# Altium PCB Arduino幻彩灯带_v2.PcbDoc
Units mil, origin at the board's own origin, x right, y up, seen from the top; angles counter-clockwise.
Board outline 2710.03 x 2110.03 mil, 2 copper layers (Top Layer, Bottom Layer); 35 components, 33 nets, 137 pads, 66 vias.
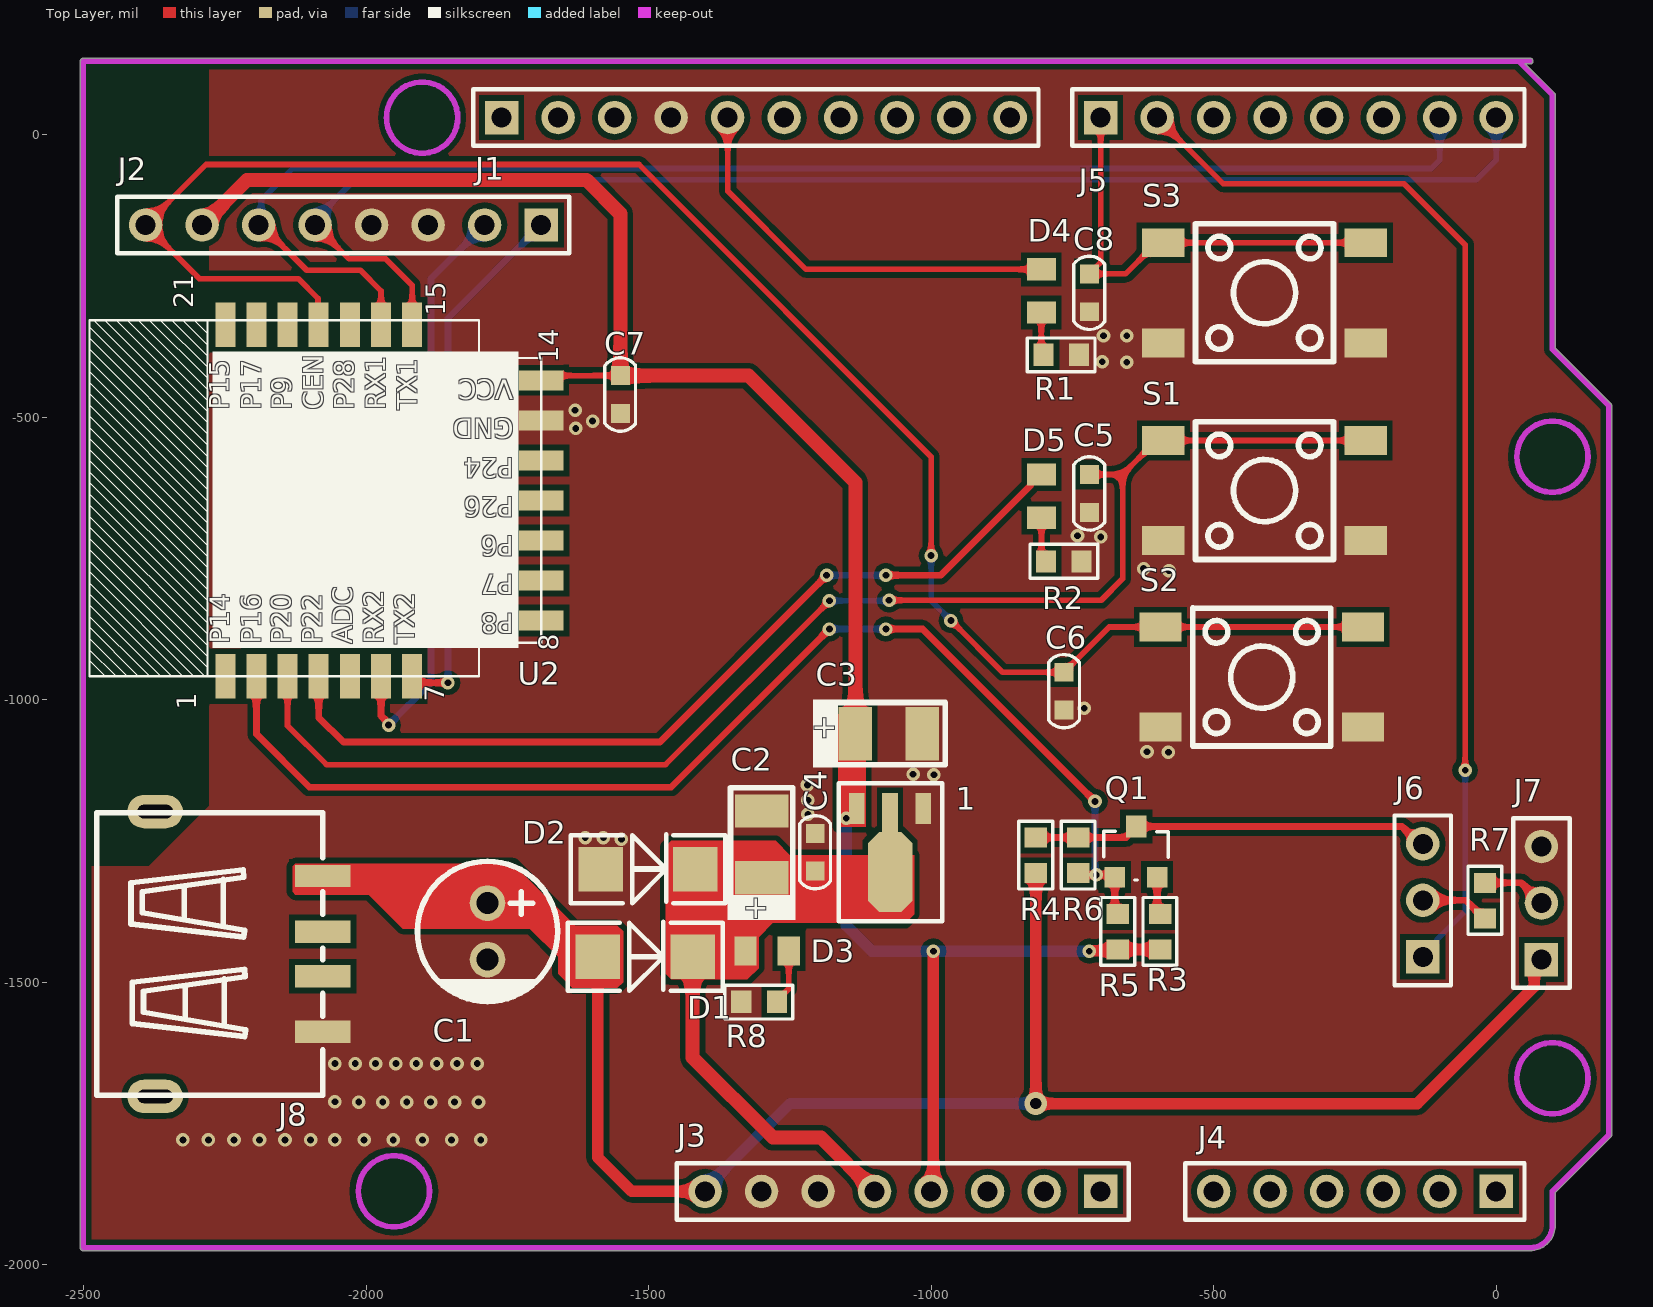
[diagram p0: Top Layer view]
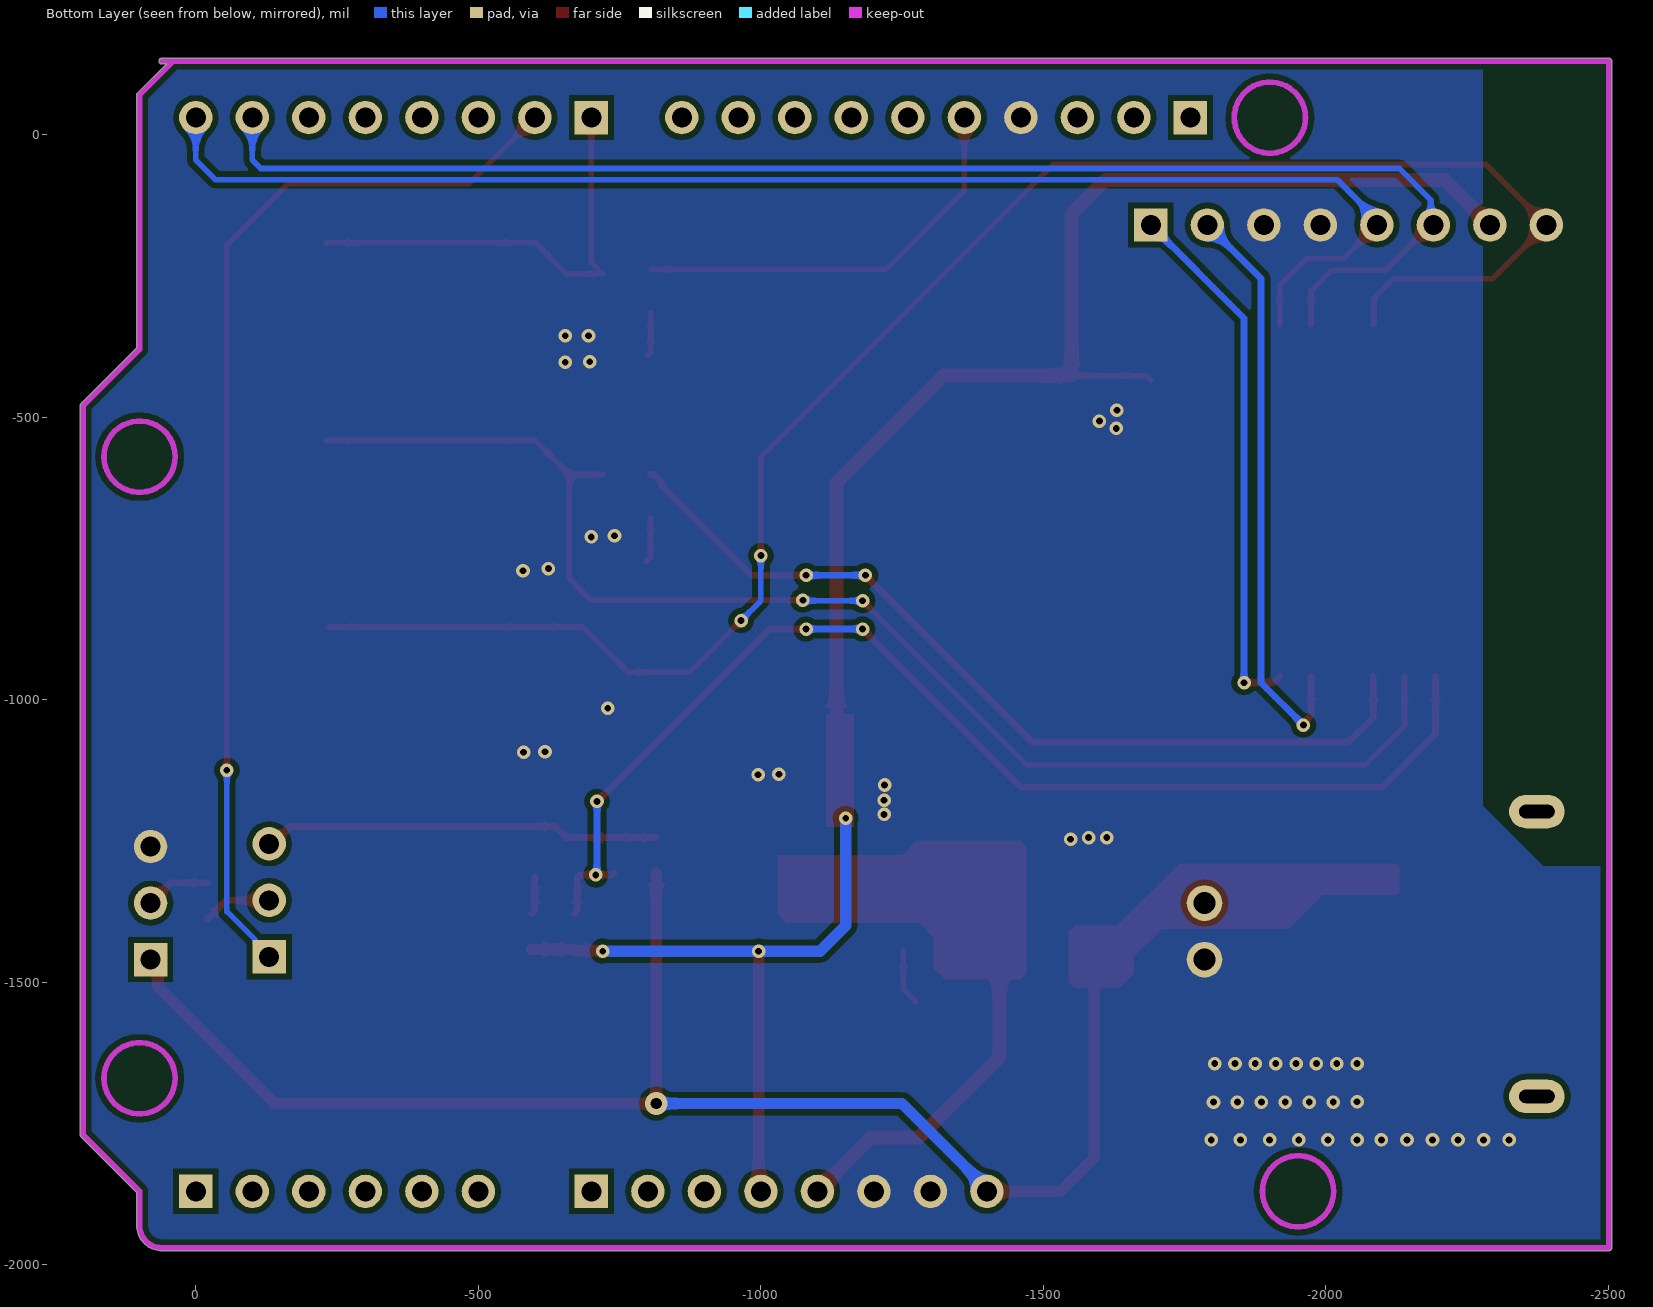
[diagram p1: Bottom Layer view, seen from below]
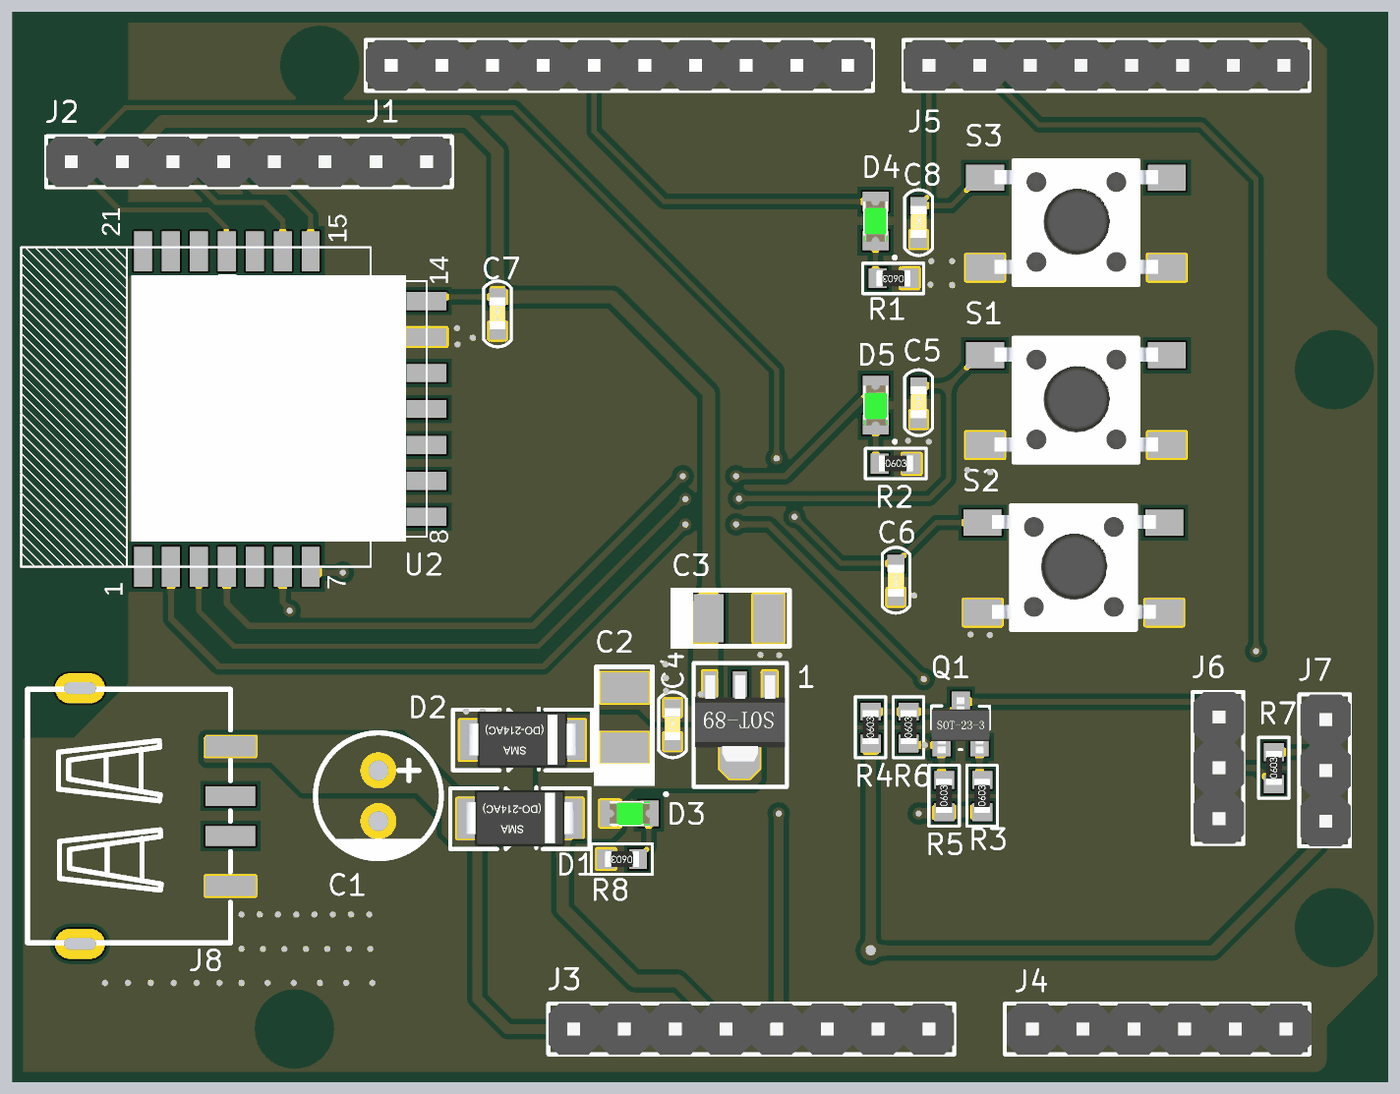
[diagram p2: 3D render of the assembled board from above, using the file's embedded part models]

## Layer stack, top to bottom
Top Solder: solder mask 0.4, Solder Resist, Dk 3.5
Top Layer: signal copper 1.4
Dielectric 1: dielectric 12.6, FR-4, Dk 4.8
Bottom Layer: signal copper 1.4
Bottom Solder: solder mask 0.4, Solder Resist, Dk 3.5

## Board outline
-2505.65,-1970 ccw(c-2500.63,-1970) -2500.63,-1975.01 60,-1975.01 60,-1975.02 ccw(c60,-1930.63) 104.39,-1930.63 ccw(c99.37,-1930.63) 104.38,-1930.6 104.38,-1872.08 202.92,-1773.55 202.89,-1773.57 ccw(c199.37,-1770) 204.39,-1770 204.38,-480.04 ccw(c199.37,-480) 204.38,-480 ccw(c199.37,-480) 202.92,-476.45 104.38,-377.92 104.38,70 ccw(c99.37,70) 102.9,73.56 102.92,73.55 51.48,124.99 60,124.99 ccw(c60,130) 65.01,130 ccw(c60,130) 60,135.02 -2500.63,135.02 ccw(c-2500.63,130) -2505.65,130

## Design rules (kind name [scope] priority, off if disabled: settings)
Clearance [All] p1: gap=10 ignorepadtopadclearanceinfootprint=FALSE except(0: Arc-Hole Track-Hole SMDPad-Hole THPad-Hole Via-Hole Fill-Hole Poly-Hole Region-Hole Text-Hole)
HoleSize [All] p1: absolutevalues=TRUE maxlimit=100 minlimit=0 maxpercent=80.000 minpercent=20.000
HoleToHoleClearance [All] p1: gap=0 allowstackedmicrovias=TRUE
MinimumSolderMaskSliver [All] p1: minsoldermaskwidth=0
PolygonConnect [All] p1: connectstyle=Direct reliefconductorwidth=10 reliefentries=4 polygonreliefangle="90 Angle" airgapwidth=10
RoutingVias [All] p1: holewidth=12 width=24 viastyle="Through Hole" minholewidth=12 minwidth=24 maxholewidth=25 maxwidth=50
SilkToSilkClearance [All] p1: silktosilkclearance=0
SilkToSolderMaskClearance [IsPad] p1: minsilkscreentomaskgap=0 clearancetoexposedcopper=TRUE
SolderMaskExpansion [All] p1: expansion=4 istentingtop=FALSE
Width [All] p1: maxlimit=50 minlimit=10 preferedwidth=20 minimp=50.000000 maximp=50.000000 favimp=50.000000
25 further rules are at their usual default settings.

## Components (designator, comment, footprint, x,y, rotation, side; value= is the part's Value field where it differs from the comment)
1 "ME6211A33PG-N" SOT89 -1075,-1305 r180 top
C1 "220uF±20%/16V" CAP-6.3*xx -1785,-1410 r270 top
C2 "22uF±20%/16V" "C-钽电容B3528 - duplicate" -1300,-1255.94 r90 top
C3 "22uF±20%/16V" "C-钽电容B3528 - duplicate" -1075,-1060 r0 top
C4 "0.1uF±20%/50V" C-0603 -1205,-1270 r90 top
C5 "0.1uF±20%/16V" C-0603 -720,-635 r90 top
C6 "0.1uF±20%/16V" C-0603 -765,-985 r270 top
C7 "0.1uF±20%/16V" C-0603 -1550,-460 r90 top
C8 "0.1uF±20%/16V" C-0603 -720,-280 r90 top
D1 "SS210" D-SMA -1501,-1457 r180 top
D2 "SMBJ05CA" D-SMA -1496,-1302 r180 top
D3 "LED" LED-0805-G -1290,-1445 r0 top
D4 "LED" LED-0805-G -805.26,-276.86 r270 top
D5 "LED" LED-0805-G -805,-640 r270 top
J1 "CON10" HDR1X10 -1760,30 r0 top locked
J2 "CON8" HDR1X8 -1690,-160 r180 top
J3 "CON8" HDR1X8 -700,-1870 r180 top locked
J4 "CON6" HDR1X6 0,-1870 r180 top locked
J5 "CON8" HDR1X8 -700,30 r0 top locked
J6 "KF301-3P" HDR1X3 -130,-1455 r90 top
J7 "KF301-3P" HDR1X3 80,-1460 r90 top
J8 "USB-A" USB-A-TH_C42425 -2225,-1450 r270 top
Q1 "S8050" SOT-23 -635,-1280 r0 top
R1 "1K±5%" R0603 -770,-390 r180 top
R2 "1K±5%" R0603 -765,-755 r0 top
R3 "2K±5%" R0603 -595,-1410 r90 top
R4 "2K±5%" R0603 -815,-1275 r90 top
R5 "2K±5%" R0603 -670,-1410 r90 top
R6 "NC/0R" R0603 -740,-1275 r90 top
R7 "1R±5%" R0603 -20,-1355 r90 top
R8 "1R±5%" R0603 -1305,-1535 r180 top
S1 "KEY_SW2" 按键-SW_4P-L6.0-W6.0-P4.50-LS9.5 -410,-630 r180 top
S2 "KEY_SW2" 按键-SW_4P-L6.0-W6.0-P4.50-LS9.5 -415,-960 r180 top
S3 "KEY_SW2" 按键-SW_4P-L6.0-W6.0-P4.50-LS9.5 -410,-280 r180 top
U2 "WIFI_BLE_CBU" WIFI_BLE_CBU -1690,-647.4 r90 top

## Footprints (in the part's own frame and the unit in brackets; to place one, negate y for a bottom-side part, rotate by r counter-clockwise, add the part's x,y. Pads: shape width x height; smd on the part's side, far side on the other; paste and mask are expansions set on the pad)
C-0603 [mm]
  rect 0.85x0.85 smd: 1(-0.85,0) 2(0.85,0)
  silkscreen extent -1.65,-0.68 1.65,0.7, body extent -0.77,-0.39 0.83,0.41, height 0.45
"C-钽电容B3528 - duplicate" [mm]
  rect 1.5x2.4 smd: 1(-1.5,0) 2(1.5,0)
  silkscreen extent -3.4,-1.52 2.54,1.52
CAP-6.3*xx [mm]
  round 1.6 hole 1: 1(-1.27,0) 2(1.27,0)
  silkscreen extent -3.15,-3.15 3.17,3.15
D-SMA [mil]
  rect 78.74x78.74 smd: A(89,-2) K(-79,-2)
  silkscreen extent -132,-64 142,58, body extent -103,-58 113,52, height 102
HDR1X3 [mm] "Connector; Header; 3 Position"
  rect 1.5x1.5 hole 0.9: 1(0,0)
  round 1.5 hole 0.9: 2(2.54,0) 3(5.08,0)
  silkscreen extent -1.27,-1.27 6.35,1.27, body extent -1.27,-1.32 6.35,1.22, height 8.54
HDR1X6 [mm] "Connector; Header; 6 Position"
  rect 1.5x1.5 hole 0.9: 1(0,0)
  round 1.5 hole 0.9: 2(2.54,0) 3(5.08,0) 4(7.62,0) 5(10.16,0) 6(12.7,0)
  silkscreen extent -1.27,-1.27 13.97,1.27, body extent -1.37,-1.27 13.87,1.27, height 8.54
HDR1X8 [mm] "Connector; Header; 8 Position"
  rect 1.5x1.5 hole 0.9: 1(0,0)
  round 1.5 hole 0.9: 2(2.54,0) 3(5.08,0) 4(7.62,0) 5(10.16,0) 6(12.7,0) 7(15.24,0) 8(17.78,0)
  silkscreen extent -1.27,-1.27 19.05,1.27, body extent -1.27,-1.27 19.05,1.27, height 8.54
HDR1X10 [mm] "Connector; Header; 10 Position"
  rect 1.5x1.5 hole 0.9: 1(0,0)
  round 1.5 hole 0.9: 2(2.54,0) 3(5.08,0) 4(7.62,0) 5(10.16,0) 6(12.7,0) 7(15.24,0) 8(17.78,0) 9(20.32,0) 10(22.86,0)
  silkscreen extent -1.27,-1.27 24.13,1.27, body extent -1.27,-1.27 24.13,1.27, height 8.54
LED-0805-G [mm]
  round 0.3 on Top Overlay mask+0: 2(1.829,0.965)
  rect 1x1.3 smd: LED+(-0.974,0.007) LED-(0.969,0.007)
  body extent -0.99,-0.62 1.03,0.64, height 1.1
R0603 [mm] "10/1W"
  rect 0.9x1 smd: 1(-0.813,-0.009) 2(0.787,-0.009)
  silkscreen extent -1.52,-0.76 1.52,0.76, body extent -0.85,-0.4 0.85,0.4, height 0.56
SOT89 [mm]
  rect 0.7x1.4 smd: 1(-1.557,-2.856) 3(1.443,-2.856)
  oct 2x3.6 smd: 2(-0.057,-0.006)
  rect 0.7x1.9 smd: 2(-0.057,-2.605)
  silkscreen extent -2.41,-3.98 2.25,2.22, body extent -2.33,-3.36 2.17,0.94
SOT-23 [mil]
  rect 36x36 smd: 1(-40,-34) 2(35,-34)
  rect 36x39.37 smd: 3(-2,55.5)
  silkscreen extent -60,-39 54,47, body extent -60,-46 55,64
USB-A-TH_C42425 [mm]
  rect 1x2.5 smd: 1(-3.5,3.765) 2(-1,3.765) 3(1,3.765) 4(3.5,3.765)
  oval 1.5x2.499 hole 0.6 slot 1.601 at 90 deg: 5(6.4,-3.765) 6(-6.4,-3.765)
  silkscreen extent -6.35,-6.39 6.35,3.77
WIFI_BLE_CBU [mm]
  rect 2x0.9 smd: 1(-7.9,14.2) 2(-7.9,12.8) 3(-7.9,11.4) 4(-7.9,10) 5(-7.9,8.6) 6(-7.9,7.2) 7(-7.9,5.8) 15(7.9,5.8) 16(7.9,7.2) 17(7.9,8.6) 18(7.9,10) 19(7.9,11.4) 20(7.9,12.8) 21(7.9,14.2)
  rect 0.9x2 smd: 8(-5.4,0) 9(-3.6,0) 10(-1.8,0) 11(0,0) 12(1.8,0) 13(3.6,0) 14(5.4,0)
  silkscreen extent -7.9,0 8.14,20.33
按键-SW_4P-L6.0-W6.0-P4.50-LS9.5 [mil]
  rect 74.8x51.18 smd: 1(-179.13,88.6) 2(-179.13,-88.6)
  rect 74.81x51.18 smd: 1(179.13,88.6) 2(179.13,-88.6)
  silkscreen extent -122,-122 122,122, body extent -162,-121 161,119, height 366

## Part data
C1 C2 C3: library part "CAPACITOR POL", "Capacitor"
C4 C5 C6 C7 C8: library part CAP, "Capacitor"
D1: library part 1N4007, "二极管 （Diode）"
D2: library part "D Schottky", "Schottky Diode", MFR=Toshiba
D3 D4 D5: library part LED-2P-G, "LED-绿"
J1 J2 J3 J4 J5: "Connector"
J6 J7: library part CON3, "Connector"
Q1: library part NPN, "NPN Transistor"
R1 R2 R3 R4 R5 R6 R7 R8: library part RES5
U2: "Module"

## Via types
v1: diameter 24, hole 12, Top Layer to Bottom Layer, tented both sides, 65 vias
v2: diameter 40, hole 20, Top Layer to Bottom Layer, tented both sides, 1 vias

## Nets (pads, with @x,y where several pads share a name; then routed paths per layer and width w, separated by ;. In a path a pad name is that pad's centre, name@x,y a point inside that pad or via, vN(x,y) a via of type N, cw(c..) or ccw(c..) an arc to the next point about the centre after c; other vN are vias at no path point)
+3.3V: 1.3 C3.1 C7.2 J2.7 J3.4 R3.1 R5.1 U2.14 | length 3365
  Top Layer w10: U2.14 -1681.73,-426.54 C7.2
  Top Layer w20: J3.4 -996,-1866 v1(-996,-1445) ; v1(-720,-1445) -719.23,-1444.23 -671.88,-1444.23 R5.1 R3.1
  Top Layer w25: J2.7 -2210.49,-80.49 -1609.51,-80.49 -1550,-140 C7.2 -1323.46,-426.54 -1134.06,-615.94 C3.1
  Bottom Layer w20: v1(-1150,-1210) -1150,-1400 -1105,-1445 v1(-720,-1445) ; J3.4 J3.4@-995,-1865
+5V: C1.1 D1.A J3.8 J7.1 J8.1 R4.1 | length 2658.2
  Top Layer w10: J3.8@-1404.53,-1865.47 J3.8
  Top Layer w20: D1.A -1590,-1810 -1530,-1870 J3.8 ; R4.1 v2(-814.65,-1714.65) -815,-1715 -140,-1715 -95,-1670 67.19,-1507.81 67.19,-1472.81 J7.1
  Bottom Layer w20: J3.8 -1400,-1865 -1249.65,-1714.65 v2(-814.65,-1714.65)
+5VF: 1.2 C2.1 C4.1 D1.K D2.K D3.LED+ J3.5 | length 598.2
  Top Layer w25: D1.K -1422,-1633 -1280,-1775 -1195,-1775 J3.5
ADC: U2.5
GND: 1.1 C1.2 C2.2 C3.2 C4.2 C5.1 C6.2 C7.1 C8.1 D2.A J1.4 J2.3 J2.4 J3.6 J3.7 J7.3 J8.4 R1.1 R2.2 R8.2 S1.1 S2.1 S3.1 U2.13
  other v1: -2324,-1779 -2278.83,-1779 -2233.67,-1779 -2188.5,-1779 -2143.33,-1779 -2098.17,-1779 -2055,-1779 -2003.4,-1779 -1951.8,-1779 -1900.2,-1779 -1848.6,-1779 -1797,-1779 -2012.67,-1712 -1970.33,-1712 -1928,-1712 -1885.67,-1712 -1843.33,-1712 -1801,-1712 -2055,-1711.5 -2055,-1644 -2019,-1644 -1983,-1644 -1947,-1644 -1911,-1644 -1875,-1644 -1839,-1644 -1803,-1644 -1548,-1247 -1612,-1244 -1580,-1244 -1218,-1203 -1218,-1178 -1219,-1151 -995,-1133 -1032,-1132 -580,-1093 -618,-1092 -729,-1015 -579,-772 -624,-768 -700,-712 -741,-710 -1629,-520 -1599,-507 -1630,-488 -654,-403 -697,-402 -695,-356 -654,-356
NetC8_2: C8.2 J5.1 S3.2 | length 796.8
  Top Layer w10: J5.1 -700,-226.54 C8.2 -656.08,-246.54 -600.94,-191.4 -589.13,-191.4 S3.2@-230.87,-191.4
NetD3_LED-: D3.LED- R8.1 | length 98.7
  Top Layer w10: R8.1 -1273,-1532.68 -1251.86,-1511.54 D3.LED-
NetD4_LED+: D4.LED+ J1.5 | length 742.4
  Top Layer w10: J1.5 -1360,-100 -1221.5,-238.5 D4.LED+
NetD4_LED-: D4.LED- R1.2 | length 76.3
  Top Layer w10: D4.LED- -805,-385.65 R1.2
NetD5_LED-: D5.LED- R2.1 | length 80.4
  Top Layer w10: D5.LED- -804.74,-747.61 R2.1
NetJ7_2: J7.2 R7.2 | length 114.6
  Top Layer w12: R7.2 44,-1324 J7.2
NetQ1_2: Q1.2 R3.2 | length 67.2
  Top Layer w12: Q1.2 -600,-1373.65 R3.2
OUT_DATA: Q1.1 R5.2 R6.1 U2.2 | length 2133.5
  Top Layer w12: U2.2 -2193.94,-1061.06 -2100,-1155 -1460,-1155 v1(-1180,-875) ; v1(-1080,-875) -1015,-875 v1(-710,-1180) ; R6.1 -736.65,-1310 v1(-707.82,-1310) -679,-1310 Q1.1 -675,-1373.65 R5.2
  Bottom Layer w12: v1(-1180,-875) v1(-1080,-875) ; v1(-710,-1180) -710,-1307.82 v1(-707.82,-1310)
OUT_RGB: J6.2 R7.1 | length 123.6
  Top Layer w12: J6.2 -53.61,-1355 -21.61,-1387 R7.1
OUT_RGB_ARD: J5.2 J6.1 | length 1929.3
  Top Layer w10: J5.2 -482.81,-87.19 -162.81,-87.19 -55,-195 v1(-55,-1125)
  Bottom Layer w10: J6.1 -105.47,-1430.47 -105.47,-1425.47 -55,-1375 v1(-55,-1125)
OUT_RGB_CBU: J6.3 Q1.3 R4.2 R6.2 | length 706.3
  Top Layer w12: R4.2 R6.2 -654.82,-1244 -637,-1226.19 Q1.3 -166.71,-1224.5 -136.21,-1255 J6.3
P6: U2.10
P6_KEY1: C5.2 S1.2 U2.3 | length 2427.8
  Top Layer w10: U2.3 -2138.82,-1046.18 -2070,-1115 -1470,-1115 v1(-1180,-825) ; v1(-1074.4,-824.04) -699.04,-824.04 -661.08,-786.08 -661.08,-601.54 ; C5.2 -661.08,-601.54 ; S1.2@-230.87,-541.4 -589.13,-541.4 -600.94,-541.4 -661.08,-601.54
  Bottom Layer w10: v1(-1180,-825) v1@-1075,-825
P7: U2.9
P8: U2.8
P9: U2.19
P14: U2.1
P15: U2.21
P17: U2.20
P22: D5.LED+ U2.4 | length 1569.5
  Top Layer w12: U2.4 -2083.7,-1031.3 -2040,-1075 -1480,-1075 v1(-1185,-780) ; v1(-1080,-780) -983.1,-780 -824.33,-621.23 -824.33,-615.33 -810.65,-601.64 D5.LED+
  Bottom Layer w12: v1(-1185,-780) v1(-1080,-780)
P24: U2.12
P26: U2.11
P28: U2.17
RST: C6.1 J2.8 S2.2 U2.18 | length 3159
  Top Layer w10: U2.18 -2085,-335.08 -2085,-290 -2120,-255 -2295,-255 J2.8 -2282.99,-52.99 -1517.01,-52.99 -1000,-570 v1(-1000,-745) ; v1(-965,-860) -873.46,-951.54 C6.1 -684.86,-871.4 -594.13,-871.4 S2.2@-235.87,-871.4
  Bottom Layer w10: v1(-1000,-745) -1000,-825 v1(-965,-860)
RX2: J2.2 U2.6 | length 1047.6
  Top Layer w12: U2.6 -1973.46,-1028.29 -1960,-1041.75 v1(-1960,-1045)
  Bottom Layer w12: v1(-1960,-1045) -1885,-970 -1885,-255 J2.2
TX2: J2.1 U2.7 | length 946.5
  Top Layer w12: U2.7 -1906.77,-970 v1(-1855,-970)
  Bottom Layer w12: v1(-1855,-970) -1855,-325 J2.1
WRX: J2.6 J5.7 U2.16 | length 2560.7
  Top Layer w10: J2.6 -2185,-160 -2105,-240 -2010,-240 -1973.46,-276.54 U2.16
  Bottom Layer w10: J2.6 -2185.47,-155.47 -2185.47,-115.47 -2130,-60 -115,-60 -100,-45 J5.7
WTX: J2.5 J5.8 U2.15 | length 2504
  Top Layer w10: J2.5 -2030,-220 -1965,-220 -1918.35,-266.65 U2.15
  Bottom Layer w10: J2.5 -2090,-150 -2020,-80 -35,-80 0,-45 J5.8
pads on no net: D3.2 D4.2 D5.2 J1.1 J1.2 J1.3 J1.6 J1.7 J1.8 J1.9 J1.10 J3.1 J3.2 J3.3 J4.1 J4.2 J4.3 J4.4 J4.5 J4.6 J5.3 J5.4 J5.5 J5.6 J8.2 J8.3 J8.5 J8.6

## Polygon pours and split planes (outlines as drawn)
GND on Bottom Layer "Top Layer-No Net" (solid, remove dead copper, pour order 0): -2500.63,-1970 -2500.63,-1295 -2383.63,-1295 -2383.63,-1294 -2303.63,-1214 -2277.63,-1188 -2277.63,130 160,130 199.37,90.63 200.37,89.63 200.37,-1973
GND on Top Layer "Top Layer-No Net" (solid, remove dead copper, pour order 1): -2500.63,-1970 -2500.63,-1295 -2383.63,-1295 -2383.63,-1294 -2303.63,-1214 -2277.63,-1188 -2277.63,130 160,130 199.37,90.63 200.37,89.63 200.37,-1973

## Keep-outs
Keep-Out Layer:
  circle w10: c-1950.63,-1870 r62.99
  circle w10: c99.37,-1670 r62.99
  circle w10: c-1900.63,30 r62.99
  circle w10: c99.37,-570 r62.99
  lines w10: -2500.63,-1930.63 -2500.63,90.63 -2500.63,130 -2450.63,130 ; -2500.63,-1914 -2500.63,-1970 -2450.63,-1970 ; -2461.26,-1970 60,-1970 ccw(c60,-1930.63) 99.37,-1930.63 99.37,-1870 199.37,-1770 199.37,-480 99.37,-380 99.37,70 39.37,130 ; -2461.26,130 60,130

## Other copper
Top Layer:
  rectangle net +3.3V: -1165,-1225 -1115,-1025
  region net +5VF: -1460,-1250 -1275,-1250 -1250,-1275 -1030,-1275 -1030,-1380 -1045,-1395 -1280,-1395 -1305,-1420 -1305,-1475 -1325,-1495 -1460,-1495 -1470,-1485 -1470,-1260
  region net +5V: -2125,-1290 -1740,-1290 -1630,-1400 -1555,-1400 -1545,-1410 -1545,-1500 -1555,-1510 -1635,-1510 -1660,-1485 -1660,-1455 -1710,-1405 -1935,-1405 -1995,-1345 -2125,-1345 -2130,-1340 -2130,-1295

## Text inside footprints (layer, text, board x,y; h text height)
C2: Top Overlay "+" at -1287,-1351.94 h39.37 r180
C3: Top Overlay "+" at -1171,-1073 h39.37 r90
U2: Top Overlay "P15" at -2231,-487.34 h59.06 r90; Top Overlay "P17" at -2175.14,-487.34 h59.06 r90; Top Overlay "P9" at -2120.54,-487.34 h59.06 r90; Top Overlay "CEN" at -2065.32,-487.34 h59.06 r90; Top Overlay "P28" at -2010.09,-487.34 h59.06 r90; Top Overlay "RX1" at -1954.23,-487.34 h59.06 r90; Top Overlay "TX1" at -1899,-487.34 h59.06 r90; Top Overlay "GND" at -1739,-491.4 h59.06 r180; Top Overlay "VCC" at -1739.06,-422.4 h59.06 r180; Top Overlay "TX2" at -1903,-901.4 h59.06 r90; Top Overlay "RX2" at -1958.05,-901.4 h59.06 r90; Top Overlay "ADC" at -2012.47,-901.4 h59.06 r90; Top Overlay "P22" at -2066.9,-901.4 h59.06 r90; Top Overlay "P20" at -2121.32,-901.4 h59.06 r90; Top Overlay "P16" at -2175.1,-901.4 h59.06 r90; Top Overlay "P14" at -2230.16,-901.4 h59.06 r90; Top Overlay "21" at -2294,-307.4 h59.06 r90; Top Overlay "1" at -2289.21,-1017.48 h59.06 r90; Top Overlay "P24" at -1739,-561.04 h59.06 r180; Top Overlay "P26" at -1739,-630.04 h59.06 r180; Top Overlay "P6" at -1739,-698.86 h59.06 r180; Top Overlay "P7" at -1739,-767.4 h59.06 r180; Top Overlay "P8" at -1739,-836.4 h59.06 r180; Top Overlay "7" at -1850.21,-1003.48 h59.06 r90; Top Overlay "8" at -1648,-913.4 h59.06 r90; Top Overlay "14" at -1648,-403.4 h59.06 r90; Top Overlay "15" at -1848,-320.4 h59.06 r90